# Altium PCB 2X-4.5-V3.PcbDoc (part 2 of 2)
Units mil, origin at the board's own origin, x right, y up, seen from the top; angles counter-clockwise.
Board outline 5631.85 x 1583.52 mil, 2 copper layers (TopLayer, BottomLayer); 126 components, 147 nets, 448 pads, 610 vias.
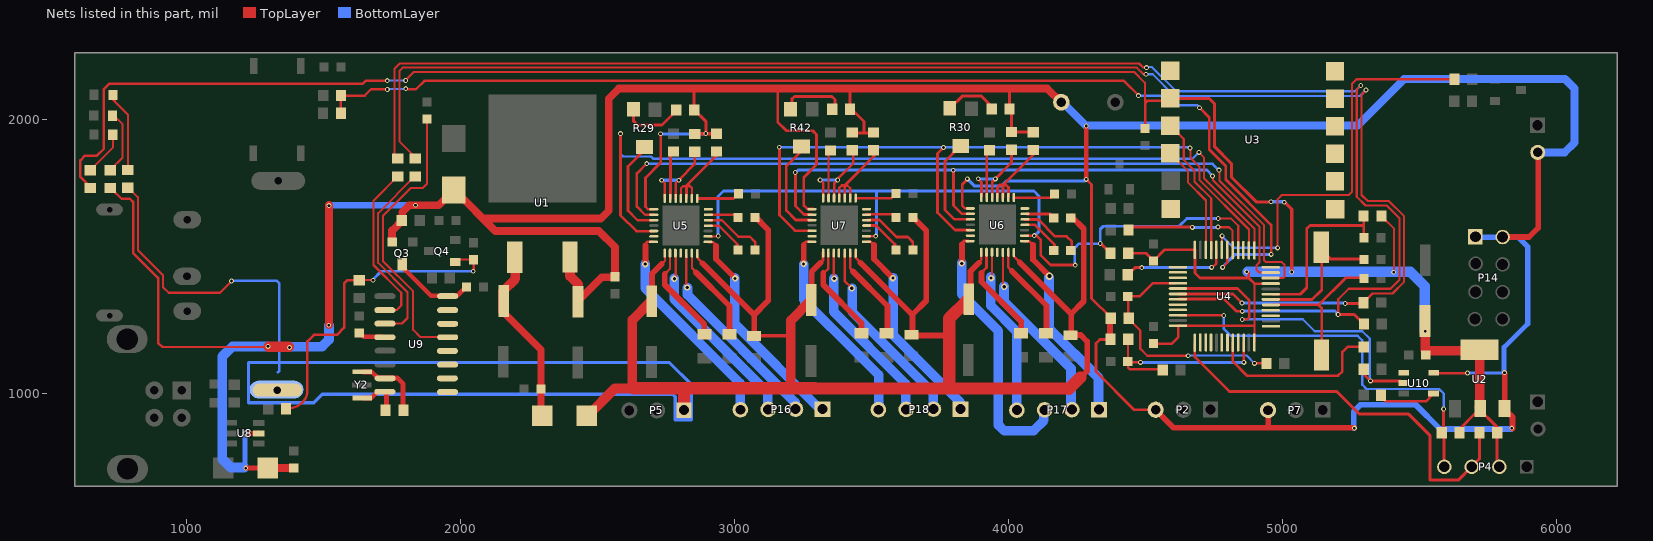
[diagram p2: the nets of this part, all layers, seen from the top]

## Via types
v1: diameter 17.72, hole 9.84, TopLayer to BottomLayer, tented both sides, 597 vias
v2: diameter 23.62, hole 11.81, TopLayer to BottomLayer, tented both sides, 11 vias
v3: diameter 27.56, hole 15.75, TopLayer to BottomLayer, tented both sides, 2 vias

## Nets (pads, with @x,y where several pads share a name; then routed paths per layer and width w, separated by ;. In a path a pad name is that pad's centre, name@x,y a point inside that pad or via, vN(x,y) a via of type N, cw(c..) or ccw(c..) an arc to the next point about the centre after c; other vN are vias at no path point) (continued)
R1-1: B1.1 C1.1 C3.2 C13.1 D4.2 D7.2 P2.3 P6.2 P7.3 P14.1 P14.2 Q3.2 R1.1 R3.2 R8.2 R12.2 R26.1 R27.1 R32.2 R33.2 R35.2 R36.2 R41.1 R43.2 R44.2 U1.3 U2.3 U5.15 U6.15 U7.15 U8.5 U10.5 | length 16229.8
  TopLayer w8.87: R1.1@727.69,1749.97 727.69,1745.81 762.06,1711.43 793.31,1711.43 804.77,1699.97 804.77,1513.93 896.02,1422.68 896.02,1185.39 911.23,1170.18 v1@1298.73,1170.18 ; U10.5@5554.35,1076.64 U10.5@5556.23,1074.77
  TopLayer w9.87: U5.15@2704.77,1672.68 2684.77,1672.68 2674.98,1682.47 2674.98,1787.68 2730.19,1842.89 v1@2730.19,1947.89 ; 3157.69,2114.56 3157.69,1991.64 3189.77,1959.56 3285.6,1959.56 3299.35,1945.81 3299.35,1836.22 3253.1,1789.97 3253.1,1686.64 3266.02,1673.72 U7.15@3287.69,1673.72 ; v1@3851.44,1785.18 3851.44,1783.93 3831.85,1764.35 3831.85,1685.6 3841.02,1676.43 U6.15@3865.81,1676.43 ; v1@4284.77,1782.06 4303.52,1763.31 4303.52,1347.68 4373.73,1277.47 R12.2@4373.73,1274.56 ; R3.2@4373.52,1197.68 4333.52,1197.68 4319.35,1183.52 4319.35,1080.81 4459.15,941.02 P2.3@4547.06,941.02 ; U10.5@5556.23,1074.77 v1@5674.77,1074.77
  TopLayer w10.87: 2852.69,2112.06 2852.27,2111.64 2852.27,2037.06 2895.19,1994.14 v1@2895.19,1950.81 ; R32.2@2863.94,1947.06 R32.2@2866.02,1949.14 ; 3422.27,2112.47 3421.02,2111.22 3421.02,2034.97 3431.02,2034.97 3472.27,1993.72 3472.27,1951.64 ; R43.2@3430.6,1948.72 3432.69,1950.81 R44.2@3517.69,1950.81 ; 4003.1,2108.72 4003.1,2044.14 4011.44,2035.81 4011.44,1961.64 4018.52,1954.56 R36.2@4092.69,1954.56 ; R3.2@4373.52,1197.68 R3.2@4376.02,1195.18
  TopLayer w11.87: R32.2@2866.02,1949.14 R35.2@2933.52,1949.14
  TopLayer w16.87: v1@4283.73,1975.6 4283.73,1783.1 v1@4284.77,1782.06
  TopLayer w17.87: v1@1217.27,727.89 1290.19,727.89 D4.2@1291.85,726.22 ; v1@1217.69,854.97 1259.77,854.97 U8.5@1260.6,855.81
  TopLayer w20.87: P2.3@4535.6,940.39 4537.69,940.39 4603.1,874.97 v1@5261.44,874.97 ; P7.3@4946.02,942.47 4948.1,940.39 4948.1,880.39 ; P14.2@5801.85,1571.22 5802.69,1572.06 5900.6,1572.06 5933.52,1604.97 P6.2@5933.52,1883.31 ; v1@5811.44,1073.72 5811.44,946.64 U2.3@5813.1,944.97 ; U2.3@5819.15,934.56 U2.3@5819.77,934.56
  TopLayer w21.87: R12.2@4370.81,1267.68 4370.81,1204.35 R3.2@4371.23,1203.93 ; U2.3@5819.77,934.56 5839.35,914.97 v1@5839.35,872.06
  TopLayer w27.87: Q3.2@1749.77,1552.89 1749.77,1595.39 1786.44,1632.06 1786.44,1662.47 1811.85,1687.89 1920.6,1687.89 1973.94,1741.22 1979.77,1741.22 2127.27,1593.72 2504.77,1593.72 2563.94,1534.56 2563.94,1437.47 2566.02,1435.39 2556.02,1425.39 2516.02,1425.39 2433.94,1343.31 C1.1@2429.77,1343.31 ; 2088.52,1639.14 2511.85,1639.14 2540.6,1667.89 2540.6,2077.06 2577.27,2113.72 4141.85,2113.72 4192.27,2063.31 B1.1@4195.6,2063.31
  TopLayer w28.87: D4.2@1303.94,730.39 1306.44,727.89 C13.1@1383.52,727.89 ; v1@1519.35,1249.97 v1@1519.35,1687.89
  TopLayer w34.87: U1.3@2399.35,1488.72 2399.35,1428.72 2429.77,1398.31 C1.1@2429.77,1343.31
  TopLayer w37.87: v1@1300.19,1170.81 v1@1373.52,1170.81
  BottomLayer w10.87: v1@3849.17,1784.58 3875,1758.75 3975.42,1758.75 3992.08,1775.42 4277.92,1775.42 v1@4283.33,1780.83 ; 4270,1775.42 v1@4283.33,1784.17 ; 4274.38,1778.33 v1@4283.12,1782.71
  BottomLayer w11.81: v1@5676.25,1075 5677.08,1075 5809.17,1075 v1@5812.08,1077.92
  BottomLayer w11.87: v1@2730.62,1948.12 2730.83,1947.92 2894.17,1947.92 v1@2895.83,1949.58
  BottomLayer w17.87: v1@1211.25,730.83 1212.92,732.5 v1@1212.92,855.83
  BottomLayer w18.81: v1@5809.58,1078.33 5809.58,1169.58 5895.42,1255.42
  BottomLayer w19.81: P14.1@5705.83,1571.25 5819.58,1571.25 5821.25,1572.08 5822.5,1573.33 5859.17,1573.33 5864.17,1568.33 5895.42,1537.08 5895.42,1255.42
  BottomLayer w20.81: v1@5260.42,873.75 5260.42,935 5284.58,959.17 5487.08,959.17 5575.42,870.83 v1@5835.42,870.83
  BottomLayer w22.87: v1@1521.25,1688.12 v1@1832.08,1688.12
  BottomLayer w28.81: B1.1@4198.33,2062.92 4282.08,1979.17 5275,1979.17 5444.58,2148.75 6031.67,2148.75 6066.25,2114.17 6066.25,1916.25 6030.83,1880.83 5932.92,1880.83 P6.2@5931.25,1879.17
  BottomLayer w34.87: v1@1373.33,1171.67 1494.17,1171.67 1519.58,1197.08 v1@1519.58,1249.17
  BottomLayer w35.87: v1@1210,730.83 1160.83,730.83 1130,761.67 1130,1135 1167.08,1172.08 v1@1297.08,1172.08
  other v1: 1215.6,727.89 1216.02,855.39 5262.69,874.14 5837.27,874.14 5675.6,1074.97 5811.02,1076.64 1375.19,1168.72 1297.27,1172.47 1518.52,1249.56 1519.35,1686.22 1835.19,1687.47 4283.94,1782.06 3849.98,1783.93 2729.77,1948.72 2895.19,1949.56 4283.94,1977.06
R1-2: D2.1 R1.2 | length 229.2
  TopLayer w7.87: R1.2@724.77,1815.81 724.77,1820.6 766.44,1862.27 766.44,1983.31 D2.1@734.98,2014.77
R2-1: C17.1 C19.1 C21.1 C22.1 C23.1 C24.1 C25.1 C30.1 C31.1 D1.1 K1.2 P5.1 pad.6 R2.1 U5.22 U5.28 U6.22 U6.28 U7.22 U7.28 | length 11227.3
  TopLayer w7.87: R2.1@785.6,1752.89 821.85,1716.64 821.85,1524.14 913.73,1432.27 913.73,1388.52 934.14,1368.1 1121.44,1368.1 1164.56,1411.22 v1@1164.98,1411.22
  TopLayer w8.87: 2728.31,1467.27 2728.52,1467.27 2746.23,1484.97 U5.22@2746.23,1511.22 ; U5.28@2864.77,1510.81 2864.77,1494.77 2891.23,1468.31 2891.23,1467.06 ; 3883.52,1471.43 3901.02,1488.93 U6.22@3901.02,1522.06 ; U6.28@4020.19,1515.39 4020.19,1500.18 4049.56,1470.81 4049.56,1468.72
  TopLayer w9.87: 3305.6,1467.47 3305.6,1468.93 3323.31,1486.64 U7.22@3323.31,1514.56 ; U7.28@3442.27,1513.52 3442.27,1497.27 3471.85,1467.68 3472.27,1467.68 ; 3883.52,1469.56 3883.52,1471.43
  TopLayer w13.87: C21.1@3072.27,1209.14 3074.77,1211.64 3199.35,1211.64
  TopLayer w19.87: C22.1@4221.85,1213.72 C22.1@4222.27,1214.14
  TopLayer w20.87: C24.1@2697.69,1346.64 2698.52,1347.47 2698.52,1437.89 2734.77,1474.14 ; 2882.69,1476.22 3071.85,1287.06 3072.27,1287.06 ; C21.1@3068.1,1210.81 3071.85,1214.56 3071.85,1287.89 3122.69,1338.72 3122.69,1598.31 C30.1@3075.6,1645.39 ; C19.1@3281.44,1349.14 3281.44,1444.97 3313.94,1477.47 ; 3459.77,1477.47 3648.1,1289.14 3648.1,1287.06 ; C17.1@3647.27,1220.81 3649.35,1222.89 3649.35,1288.31 3700.19,1339.14 3700.19,1594.97 C23.1@3647.69,1647.47 ; C17.1@3648.52,1215.39 3651.44,1212.47 3774.77,1212.47 ; C25.1@3853.52,1369.56 3861.44,1377.47 3861.44,1447.06 3892.27,1477.89 ; 4041.02,1478.72 4228.94,1290.81 4228.94,1214.97 C22.1@4229.35,1214.56 ; C22.1@4222.27,1214.14 4263.94,1214.14 4287.27,1190.81 4287.27,1082.06 4267.27,1062.06 ; 4229.35,1292.06 4230.19,1292.06 4275.19,1337.06 4275.19,1602.06 C31.1@4230.6,1646.64
  TopLayer w34.87: 3205.6,1033.72 3205.6,1267.47 C19.1@3279.77,1341.64
  TopLayer w35.87: D1.1@2466.44,922.06 2562.69,1018.31 2626.85,1018.31 2626.85,1268.72 2692.27,1334.14 C24.1@2692.27,1334.56
  TopLayer w43.87: P5.1@2815.19,944.14 2816.02,944.97 2816.02,1008.72
  TopLayer w44.87: 2631.02,1019.56 3293.52,1019.56 4221.02,1017.89 4262.27,1059.14 ; 3779.35,1024.97 3783.52,1029.14 3783.52,1274.14 C25.1@3848.1,1338.72
  BottomLayer w9.87: v1@1165,1412.5 1327.92,1412.5 1338.33,1402.08 1338.33,1194.58 1338.33,1083.33 1333.33,1078.33
  BottomLayer w11.81: 1235,966.67 1463.75,966.67 1495,997.92 2774.17,997.92 2783.33,988.75 2783.33,905 2841.25,905 2843.33,905 2843.33,1032.5 2762.08,1113.75 2706.25,1113.75 1225.83,1113.75 1225.83,966.67 1249.58,966.67
  other v1: 1163.94,1410.81
R2-2: D3.1 R2.2 | length 322.1
  TopLayer w7.87: D3.1@732.06,2096.64 732.06,2072.06 785.81,2018.31 785.81,1816.85 R2.2@786.44,1816.22 ; 737.27,2067.89 D3.1@737.27,2087.06
R9-1: C2.1 Q4.1 R9.1 R46.2 | length 1214.3
  TopLayer w7.87: R46.2@1630.39,1413.52 R46.2@1631.64,1414.77 ; R46.2@1633.52,1412.89 1635.39,1414.77 v1@1680.81,1414.77
  TopLayer w8.87: R9.1@1357.48,947.06 1370.6,947.06 ccw(c1370.6,1021.99) 1423.59,969.01 1423.73,969.14 ccw(c1382.99,1009.88) 1440.6,1009.88 1440.6,1190.81 1464.35,1214.56 1548.31,1214.56 1574.98,1241.22 1574.98,1402.47 1586.02,1413.52 R46.2@1630.39,1413.52 ; Q4.1@1983.94,1482.89 1990.81,1489.77 2047.27,1489.77 v1@2047.27,1447.27
  BottomLayer w9.87: v1@1680,1415 1680,1416.25 1710.42,1446.67 v1@2047.08,1446.67
  other v1: 1680.6,1413.72 2046.44,1446.64
R15-1: R15.1 R16.1 U4.18 | length 4175.3
  TopLayer w7.87: R16.1@1562.69,2023.72 1562.27,2024.14 1562.27,2083.93 R15.1@1566.23,2087.89
  TopLayer w8.66: v1@1799.14,2113.93 1802.06,2111.02 1837.06,2111.02 1867.69,2141.64 4421.85,2141.64 v1@4476.02,2087.47
  TopLayer w8.87: R15.1@1566.23,2087.89 1650.19,2087.89 1673.31,2111.02 v1@1732.27,2111.02 ; v1@4781.65,1461.02 4782.27,1461.02 4798.94,1477.68 U4.18@4798.94,1524.77
  TopLayer w9.87: v1@4697.48,2043.93 4733.1,2008.31 4733.1,1891.64 4793.31,1831.43 4793.31,1781.85 4959.15,1616.02 4959.15,1508.1 v1@4958.73,1507.68
  BottomLayer w7.87: v1@1734.58,2109.38 1737.29,2112.08 v1@1799.38,2112.08
  BottomLayer w8.87: v1@4474.79,2086.88 4475,2087.08 4556.46,2087.08 4590.42,2053.12 4689.17,2053.12 v1@4698.12,2044.17
  BottomLayer w10.87: v1@4783.12,1460 4783.12,1464.38 4827.5,1508.75 v1@4957.71,1508.75
  other v1: 4781.85,1460.81 4958.94,1508.31 4697.27,2043.72 4474.77,2087.89 1732.69,2110.39 1799.77,2113.31
R29-2: R26.2 R29.2 | length 234.4
  TopLayer w10.87: R29.2@2628.52,2045.81 2631.85,2042.47 2631.85,1994.14 2645.19,1980.81 2735.19,1980.81 R26.2@2786.44,2032.06
R30-2: R27.2 R30.2 | length 193
  TopLayer w10.87: R30.2@3791.44,2046.22 3831.02,2085.81 3901.44,2085.81 3938.52,2048.72 R27.2@3938.52,2034.56
R31-1: C8.1 C9.1 C14.1 C15.1 C16.2 P4.2 R6.1 R10.1 R14.1 R31.1 R34.1 U2.2 U2.4 U3.2 U4.9 U4.24 U4.36 U4.48 | length 8830.3
  TopLayer w7.87: v1@1799.77,2143.1 1799.77,2144.77 1829.14,2174.14 4458.73,2174.14 4498.1,2134.77 C16.2@4498.1,1970.18 ; 4499.98,2070.39 4507.48,2070.39 ; 4500.81,2067.06 4505.81,2067.06 ; R6.1@5361.85,1643.1 5366.44,1643.1 5407.9,1601.64 v1@5407.9,1443.72
  TopLayer w8.87: R31.1@651.44,1751.85 611.85,1791.43 611.85,1851.43 629.14,1868.72 672.27,1868.72 697.69,1894.14 697.69,1951.43 697.69,2111.64 716.85,2130.81 1409.77,2130.81 1642.48,2130.81 1654.56,2142.89 1733.73,2142.89 v1@1733.94,2143.1 ; U4.48@4898.31,1191.64 4898.31,1401.02
  TopLayer w9.87: R34.1@4436.65,1512.47 4502.9,1512.47 4529.35,1486.02 C14.1@4529.35,1479.97 ; C16.2@4498.52,1966.43 4499.15,1967.06 4499.15,2059.35 4509.35,2069.56 U3.2@4572.48,2069.56 ; C15.1@4524.77,1181.85 4525.4,1182.47 4596.65,1182.47 4619.56,1205.39 4619.56,1247.68 4897.06,1247.68 ; C14.1@4531.44,1484.35 4531.44,1486.22 4570.6,1525.39 4680.81,1525.39 4680.81,1440.6 4699.56,1421.85 4877.27,1421.85 4897.69,1401.43 U4.9@4958.1,1401.43 ; v1@4870.19,1446.64 4871.65,1446.64 4877.69,1440.6 4877.69,1422.06 ; 4897.9,1401.43 4898.31,1401.02
  TopLayer w10.87: U3.2@4572.48,2069.56 4580.4,2077.47 4733.1,2077.47 4752.9,2057.68 4752.9,1900.81 4813.52,1840.18 4813.52,1790.81 4904.15,1700.18 v1@4958.52,1700.18 ; R10.1@5644.15,867.68 5712.69,936.22 5712.69,948.93 5783.94,877.68 5783.94,859.77 5783.94,742.27 P4.2@5793.1,733.1
  TopLayer w11.87: v1@5008.73,1698.93 5034.35,1673.31 5034.35,1445.81 v1@5035.19,1444.97
  TopLayer w34.87: C8.1@5521.02,1243.31 5521.02,1156.22 5714.77,1156.22 5720.6,1150.39 5720.6,952.06 U2.2@5718.52,949.97
  BottomLayer w7.87: v1@1732.08,2143.54 1732.5,2143.12 v1@1798.96,2143.12
  BottomLayer w11.87: v1@4958.33,1699.79 4958.75,1700.21 v1@5006.46,1700.21
  BottomLayer w37.81: v1@4872.5,1444.58 5467.5,1444.58 5519.58,1392.5 v1@5519.58,1228.75
  other v1: 5521.85,1227.47 5406.02,1443.31 5034.35,1444.14 4869.35,1444.97 5006.85,1698.72 4958.1,1700.39 1732.06,2142.68 1799.35,2143.31
R31-2: D5.1 R31.2 | length 156.1
  TopLayer w7.87: R31.2@651.85,1819.35 652.06,1819.35 730.6,1897.89 D5.1@730.6,1942.68
R42-2: R41.2 R42.2 | length 246
  TopLayer w10.87: R42.2@3209.35,2037.47 3209.35,2074.97 3219.35,2084.97 3355.19,2084.97 3366.85,2073.31 3366.85,2038.31 R41.2@3361.85,2033.31
R51-2: R19.2 R51.2 U4.31 | length 5763.2
  TopLayer w7.87: R51.2@1769.14,1856.85 1759.35,1866.64 1759.35,2186.64 1778.1,2205.39 4476.65,2205.39 4491.65,2190.39 v1@4504.98,2190.39 ; v1@5204.15,1290.81 5204.15,1344.35 5242.48,1382.68 5394.77,1382.68 5427.27,1415.18 5427.27,1639.77 5380.4,1686.64 5303.31,1686.64 5271.23,1718.72 5271.23,2110.81 5285.6,2125.18 v1@5286.44,2125.18
  TopLayer w9.87: U4.31@4623.1,1345.18 4787.48,1345.18 4831.85,1300.81 4854.15,1300.81 v1@4854.56,1300.39
  TopLayer w10.87: v1@5204.15,1290.81 5205.81,1289.14 5262.27,1289.14 R19.2@5295.6,1255.81
  BottomLayer w7.87: v1@4504.58,2190.62 4506.46,2192.5 4523.33,2192.5 4612.08,2103.75 5265.21,2103.75 v1@5285,2123.54
  BottomLayer w10.87: v1@4852.92,1301.25 5191.67,1301.25 5202.92,1290 v1@5202.92,1289.58
  other v1: 5203.52,1289.14 4853.31,1300.39 5286.02,2124.56 4503.94,2189.97
R52-2: R18.2 R52.2 U4.30 | length 5614.1
  TopLayer w7.87: R52.2@1832.48,1856.43 1832.48,1864.97 1777.48,1919.97 1777.48,2178.93 1788.52,2189.97 4468.73,2189.97 4493.73,2164.97 v1@4504.15,2164.97 ; R18.2@5299.56,1335.81 5329.15,1365.39 5401.65,1365.39 5444.35,1408.1 5444.35,1647.27 5388.52,1703.1 5311.23,1703.1 5288.94,1725.39 5288.94,2067.06 5288.94,2091.22 5306.23,2108.52 v1@5306.23,2108.72
  TopLayer w9.87: U4.30@4622.9,1363.72 4819.56,1363.72 v1@4852.06,1331.22
  TopLayer w10.87: v1(5229.35,1329.14) R18.2@5298.1,1329.14
  BottomLayer w7.87: v1@4501.67,2165.62 4526.67,2165.62 4605.62,2086.67 5283.12,2086.67 v1@5305.42,2108.96
  BottomLayer w10.87: v1@4852.08,1331.25 4853.33,1330 v1@5229.58,1330
  other v1: 4852.48,1331.02 5305.19,2108.72 4502.27,2165.81
U1-1: C4.1 C6.1 D1.2 U1.1 | length 622
  TopLayer w26.87: C6.1@2154.77,1298.72 2293.52,1159.97 2293.52,927.06 D1.2@2297.27,923.31
  TopLayer w34.87: C6.1@2154.77,1298.72 2154.77,1373.72 2199.77,1418.72 2199.77,1464.14 U1.1@2202.27,1466.64
U3-1: U3.1
U3-6: U3.6
U3-7: U3.7
U3-8: U3.8
U3-9: U3.9
U3-10: U3.10
U3-11: U3.11
U3-12: U3.12
U4-1: U4.1
U4-3: U4.3
U4-4: U4.4
U4-5: C12.2 U4.5 Y1.2 | length 547.5
  TopLayer w9.87: U4.5@4963.94,1324.14 5132.48,1324.14 5231.23,1422.89 C12.2@5299.56,1422.89 ; 5130.4,1323.52 5132.69,1323.52 5143.52,1312.68 Y1.2@5143.52,1159.35
U4-6: C11.2 U4.6 Y1.1 | length 505.9
  TopLayer w9.87: U4.6@4958.1,1343.52 5108.31,1343.52 5143.73,1378.93 5143.73,1517.06 Y1.1@5150.4,1517.06
  TopLayer w10.87: Y1.1@5150.4,1517.06 5176.44,1491.02 C11.2@5300.4,1491.02
U4-7: C10.2 R6.2 U4.7 | length 642.8
  TopLayer w9.87: U4.7@4964.15,1362.68 5065.19,1362.68 5088.94,1386.43 5088.94,1602.06 5100.6,1613.72 5295.19,1613.72 ; C10.2@5296.85,1565.81 5297.27,1566.22 R6.2@5297.27,1647.06
U4-12: U4.12
U4-15: U4.15
U4-17: R24.1 U4.17 | length 454.9
  TopLayer w7.87: v1@4764.15,1608.1 4764.77,1607.47 4805.4,1607.47 4818.31,1594.56 U4.17@4818.31,1534.35
  TopLayer w9.87: R24.1@4432.48,1601.64 4438.94,1608.1 v1@4670.19,1608.1
  BottomLayer w10.87: v1@4670.62,1607.08 v1@4765.21,1607.08
  other v1: 4671.44,1607.06 4765.19,1608.31
U4-19: R17.2 U4.19 | length 1502.7
  TopLayer w7.87: U4.19@4779.15,1540.39 4779.15,1576.64 v1@4780.6,1578.1 ; v1@4982.69,1530.81 4982.69,1709.77 4997.9,1724.97 5242.27,1724.97 5254.15,1736.85 5254.15,2131.02 5270.81,2147.68 5631.02,2147.68 R17.2@5632.27,2146.43
  BottomLayer w8.87: v1@4778.54,1575.21 4821.46,1532.29 4983.54,1532.29 v1@4983.75,1532.5
  other v1: 4982.69,1532.06 4780.19,1575.81
U4-20: R5.1 U4.20 | length 394.6
  TopLayer w8.87: R5.1@4434.15,1434.35 R5.1@4436.44,1434.35 ; v1@4741.44,1460.18 4743.73,1460.18 4758.94,1475.39 U4.20@4758.94,1524.56
  TopLayer w9.87: R5.1@4436.44,1434.35 4462.9,1460.81 v1@4485.4,1460.81
  BottomLayer w10.87: v1@4485.83,1461.25 4487.5,1459.58 4740.42,1459.58 v1@4743.33,1462.5
  other v1: 4486.44,1459.97 4741.85,1460.81
U4-21: U3.3 U4.21 | length 493.2
  TopLayer w7.87: U3.3@4607.9,1961.85 4639.98,1929.77 4639.98,1853.31 4679.35,1813.93 4679.35,1773.72 4740.4,1712.68 U4.21@4740.4,1523.52
U4-22: U3.4 U4.22 | length 390.7
  TopLayer w7.87: U3.4@4600.19,1869.77 4600.19,1867.89 4655.81,1812.27 4655.81,1770.39 4721.02,1705.18 U4.22@4721.02,1529.14
U4-25: U4.25
U4-26: U4.26
U4-27: U4.27
U4-28: C18.1 R12.1 R49.2 U4.28 | length 890
  TopLayer w8.87: U4.28@4608.31,1403.52 4527.48,1403.52 4478.73,1354.77 4441.85,1354.77 4437.27,1350.18 4437.27,1273.93 4481.65,1229.56 4481.65,1163.72 4506.85,1138.52 v1@4658.73,1138.52 ; v1@4896.23,1110.81 4942.48,1110.81 R49.2@4943.31,1109.97
  BottomLayer w7.87: v1@4655.21,1139.17 4870,1139.17 4899.58,1109.58 v1@4899.58,1109.17
  other v1: 4898.52,1110.39 4656.02,1138.31
U4-29: R13.2 U4.29 U10.2 | length 1182.9
  TopLayer w9.87: U4.29@4622.06,1383.72 4835.81,1383.72 4879.15,1340.39 4879.15,1278.31 4872.69,1271.85 4854.98,1271.85 v1@4854.35,1271.22 ; R13.2@5298.31,1083.31 5298.31,1069.97 5322.27,1046.02 5430.19,1046.02 U10.2@5438.31,1037.89
  BottomLayer w8.87: v1@4852.29,1271.67 5074.17,1271.67 5117.92,1227.92 5291.67,1227.92 5318.75,1200.83 5318.75,1048.75 v1@5321.25,1046.25
  other v1: 5321.44,1046.64 4853.73,1270.6
U4-32: U4.32
U4-33: U4.33
U4-34: P4.4 R10.2 U4.34 | length 1469.8
  TopLayer w9.87: U4.34@4626.23,1285.6 4782.06,1285.6 v1@4786.65,1285.6 ; v1@5588.52,944.56 5588.31,944.35 5588.31,856.22 5590.19,854.35 P4.4@5590.19,738.93
  BottomLayer w8.87: v1@4785.42,1286.67 4785.42,1237.92 4812.71,1210.62 5275.21,1210.62 5291.46,1194.38 5291.46,1033.12 5307.71,1016.88 5571.88,1016.88 5589.38,999.38 5589.38,943.33 v1@5588.75,942.71
  other v1: 5588.52,944.14 4786.02,1284.97
U4-37: P4.3 R14.2 U4.37 | length 1490.5
  TopLayer w9.87: U4.37@4680.4,1180.81 4680.4,1133.52 4806.23,1007.68 5198.52,1007.68 ; P4.3@5692.27,734.56 P4.3@5692.27,734.97 ; P4.3@5698.31,740.81 5698.31,741.02 5719.56,762.27 5719.56,857.06 R14.2@5717.48,859.14
  TopLayer w10.87: 5198.52,1007.68 5281.23,924.97 5461.02,924.97 5538.1,847.89 5538.1,684.14 5641.85,684.14 P4.3@5692.27,734.56
U4-38: U4.38
U4-39: U4.39
U4-40: U4.40
U4-42: U4.42
U4-43: U4.43
U4-44: R4.2 U4.44 | length 653.2
  TopLayer w9.87: U4.44@4818.94,1185.6 4818.94,1116.85 4869.98,1065.81 4953.73,1065.81 5203.52,1065.81 5218.94,1081.22 5218.94,1151.64 5238.94,1171.64 5295.4,1171.64 R4.2@5296.65,1170.39
U4-45: U4.45
U4-46: C7.1 R3.1 R48.2 U4.46 | length 742.8
  TopLayer w8.87: C7.1@4437.9,1120.6 4436.44,1119.14 4436.44,1095.6 4443.52,1088.52 R48.2@4568.31,1088.52 ; R3.1@4438.52,1205.39 4436.44,1203.31 4436.44,1119.56 4440.81,1115.18 v1@4481.02,1115.18
  TopLayer w9.87: v1@4858.31,1113.31 4858.73,1113.72 U4.46@4858.73,1185.39
  BottomLayer w9.87: v1@4483.12,1113.75 4859.58,1113.75 v1@4860,1114.17
  other v1: 4481.85,1114.14 4859.35,1114.14
U5-1: P16.1 U5.1 | length 798.3
  TopLayer w8.87: U5.1@2906.44,1553.31 2921.02,1553.31 2932.27,1542.06
  TopLayer w20.87: 2932.69,1539.97 2932.69,1491.22 3001.44,1422.47 v2@3001.44,1421.22
  BottomLayer w34.81: v2@3000,1422.08 3000,1255.42 3314.17,941.25 P16.1@3323.75,941.25
  other v2: 3001.85,1420.39
U5-2: R34.2 U4.16 U5.2 U6.2 U7.2 | length 2857.7
  TopLayer w7.87: U5.2@2904.77,1573.93 v1@2942.06,1573.93 ; v1@4764.98,1638.72 4812.9,1638.72 4838.73,1612.89 U4.16@4838.73,1536.43
  TopLayer w8.87: U6.2@4058.73,1576.64 4093.73,1576.64 4102.48,1576.64 4118.52,1560.6 4118.52,1504.35
  TopLayer w9.87: U7.2@3481.85,1574.77 3514.98,1574.77 v1@3515.81,1575.6 ; 4118.52,1504.35 4153.31,1469.56 v1@4243.73,1469.56 ; v1@4335.19,1549.35 4371.02,1513.52 R34.2@4371.02,1509.35
  BottomLayer w9.87: v1@2940,1575.21 v1@2940.21,1575 ; v1@4242.5,1469.58 4242.5,1532.5 4257.5,1547.5 4334.17,1547.5 4335,1548.33 4335,1600 4346.04,1611.04 4623.12,1611.04 4651.25,1639.17 v1@4766.88,1639.17
  BottomLayer w10.87: v1@2940,1575.21 2940,1719.79 2959.79,1739.58 3715.42,1739.58 4092.92,1739.58 4110.83,1721.67 4110.83,1591.25 v1@4094.17,1574.58 ; v1@3515,1576.25 3518.33,1579.58 3518.33,1642.92 3518.33,1735.83
  other v1: 4243.94,1469.14 4335.19,1547.89 2940.6,1575.39 3515.6,1574.97 4094.35,1576.64 4765.6,1639.14
U5-4: C27.2 U5.4 | length 194.7
  TopLayer w8.87: U5.4@2909.14,1612.89 2942.69,1612.89 3012.27,1543.31 C27.2@3012.27,1523.52 ; C27.2@3008.31,1523.52 3008.31,1547.06 ; C27.2@3008.73,1524.77 3008.73,1544.14
U5-5: C27.1 U5.5 | length 227.9
  TopLayer w8.87: U5.5@2905.19,1632.68 2954.14,1632.68 3014.35,1572.47 3056.44,1572.47 3075.19,1553.72 C27.1@3075.19,1528.52
U5-6: C30.2 U5.6 | length 101
  TopLayer w8.87: U5.6@2906.64,1653.1 C30.2@3007.69,1653.1
U5-7: U5.7
U5-8: C33.2 U5.8 | length 153.5
  TopLayer w9.87: U5.8@2866.44,1712.47 2996.64,1712.47 C33.2@3013.1,1728.93
U5-9: R35.1 U5.9 U5.10 U5.11 | length 346.4
  TopLayer w7.87: 2834.14,1759.77 2834.14,1767.89
  TopLayer w8.87: U5.11@2804.56,1716.43 2804.56,1749.77 2812.06,1757.27 2837.89,1757.27 2844.77,1750.39 U5.9@2844.77,1712.89
  TopLayer w9.87: 2823.52,1757.47 2934.77,1868.72 R35.1@2934.77,1886.02 ; U5.10@2824.56,1714.56 2824.56,1756.64 ; 2831.85,1758.31 2831.85,1762.89
U5-12: R32.1 U5.12 U5.14 | length 328.8
  TopLayer w8.87: v1@2733.94,1779.77 2733.94,1779.56 2745.39,1768.1 U5.14@2745.39,1717.06 ; U5.12@2785.6,1711.85 2785.6,1768.31 2796.85,1779.56 2796.85,1780.39 2854.56,1838.1 R32.1@2854.56,1881.43
  BottomLayer w11.87: v1@2733.54,1778.33 2733.75,1778.54 2768.12,1778.54 v1@2796.67,1778.54
  other v1: 2733.94,1779.14 2796.85,1779.14
U5-13: R38.1 U5.13 | length 157.9
  TopLayer w9.87: U5.13@2766.02,1713.52 R38.1@2766.02,1871.43
U5-16: U4.10 U5.16 | length 2921.6
  TopLayer w7.87: v1@4769.98,1816.64 4769.98,1777.89 4933.31,1614.56 4933.31,1487.06 4940.4,1479.97 4997.9,1479.97 5007.48,1470.39 5007.48,1427.06 5002.48,1422.06 U4.10@4956.65,1422.06
  TopLayer w8.87: v1@2680.81,1839.97 2679.77,1839.97 2643.52,1803.72 2643.52,1682.47 2673.1,1652.89 U5.16@2707.69,1652.89
  BottomLayer w9.87: v1@2679.79,1838.75 2680,1838.96 4745.21,1838.96 v1@4767.5,1816.67
  other v1: 4768.94,1815.81 2679.77,1839.56
U5-17: R29.3 U5.17 | length 364.2
  TopLayer w8.87: 2610.81,1668.1 2646.23,1632.68 U5.17@2704.14,1632.68
  TopLayer w9.87: 2610.81,1668.1 2610.81,1829.77 R29.3@2677.69,1896.64
U5-19: U4.13 U5.19 | length 3086.4
  TopLayer w7.87: v1@4694.98,1881.02 4713.52,1862.47 4713.52,1787.06 4897.69,1602.89 U4.13@4897.69,1531.43
  TopLayer w9.87: v1@2583.73,1949.97 2583.73,1651.02 2641.44,1593.31 U5.19@2705.81,1593.31
  BottomLayer w8.87: v1@2582.71,1951.04 2585.21,1948.54 2585.21,1873.96 2593.54,1865.62 2695.42,1865.62 2704.17,1856.88 4671.04,1856.88 v1@4697.08,1882.92
  other v1: 4695.6,1880.81 2583.52,1949.14
U5-20: U5.20
U5-21: P16.4 U5.21 | length 777.9
  TopLayer w8.87: 2671.02,1543.72 2681.02,1553.72 U5.21@2700.81,1553.72
  TopLayer w21.87: v2@2674.14,1473.93 2674.77,1474.56 2674.77,1541.64
  BottomLayer w34.81: v2@2673.33,1474.17 2673.33,1385 3020.83,1037.5 3020.83,987.08 3020.83,943.33 P16.4@3020,942.5
  other v2: 2673.94,1472.89
U5-23: R21.1 U5.23 | length 372.7
  TopLayer w8.87: 2745.6,1432.06 2745.6,1436.85 2764.56,1455.81 U5.23@2764.56,1513.93
  TopLayer w20.87: 2745.6,1437.06 2745.6,1397.47 2889.35,1253.72 2889.35,1215.39 R21.1@2890.6,1214.14
U5-24: P16.3 U5.24 | length 720.6
  TopLayer w8.87: v2@2779.98,1415.6 2785.19,1420.81 U5.24@2785.19,1512.47
  BottomLayer w34.81: v2@2780.42,1420.42 2780.42,1344.17 3120.83,1003.75 3120.83,944.58 P16.3@3117.5,941.25
  other v2: 2780.6,1419.14
U5-25: U5.25
U5-26: P16.2 U5.26 | length 727.1
  TopLayer w8.87: v2@2824.56,1389.35 U5.26@2824.56,1505.39
  BottomLayer w34.81: v2@2828.33,1386.25 2828.33,1360.83 3221.25,967.92 3221.25,939.17 P16.2@3220.42,938.33
  other v2: 2827.69,1387.47
U5-27: R20.1 U5.27 | length 355.2
  TopLayer w8.87: U5.27@2844.77,1510.6 2844.77,1458.52 2865.81,1437.47 2865.81,1435.18
  TopLayer w20.87: 2858.52,1443.31 2981.85,1319.97 R20.1@2981.85,1223.31
U6-1: P17.1 U6.1 | length 725.1
  TopLayer w9.87: U6.1@4059.35,1556.64 4075.6,1556.64 4088.1,1544.14
  TopLayer w20.87: 4089.35,1543.31 4089.35,1489.14 4148.1,1430.39 v3@4148.1,1429.14
  BottomLayer w36.81: v3@4148.33,1424.58 4148.33,1316.25 4148.33,1237.92 4329.17,1057.08 4329.17,949.17 P17.1@4327.5,947.5
  other v3: 4149.58,1429.17
U6-4: C28.2 U6.4 | length 157.1
  TopLayer w9.87: U6.4@4063.31,1616.02 4096.85,1616.02 4168.31,1544.56 C28.2@4168.31,1522.06
U6-5: C28.1 U6.5 | length 240.6
  TopLayer w9.87: U6.5@4058.31,1635.81 4108.94,1635.81 4170.4,1574.35 4211.85,1574.35 4231.44,1554.77 4231.44,1529.14 C28.1@4225.6,1523.31
U6-6: C31.2 U6.6 | length 109.4
  TopLayer w9.87: U6.6@4065.6,1655.81 4153.52,1655.81 C31.2@4168.73,1640.6
U6-7: U6.7
U6-8: C34.2 U6.8 | length 150.6
  TopLayer w9.87: U6.8@4020.6,1714.97 4154.15,1714.97 C34.2@4166.23,1727.06
U6-9: R36.1 U6.9 U6.10 U6.11 | length 336.6
  TopLayer w9.87: U6.11@3959.98,1716.43 3959.98,1754.14 3967.69,1761.85 3991.02,1761.85 3999.98,1752.89 U6.9@3999.98,1718.72 ; U6.10@3980.19,1715.81 3980.19,1762.27 4091.64,1873.72 R36.1@4091.64,1887.47
U6-12: R33.1 U6.12 U6.14 | length 332.6
  TopLayer w9.87: v1@3889.14,1784.56 3889.14,1783.31 3901.23,1771.22 U6.14@3901.23,1719.77 ; U6.12@3940.81,1717.47 3940.81,1772.89 4011.02,1843.1 4011.02,1887.89 R33.1@4012.06,1888.93
  BottomLayer w10.87: v1@3890.62,1784.58 3891.04,1784.17 v1@3952.29,1784.17
  other v1: 3889.98,1784.35 3952.27,1784.14
U6-13: R39.1 U6.13 | length 162.1
  TopLayer w9.87: U6.13@3921.23,1716.85 R39.1@3921.23,1878.93
U6-17: R30.3 U6.17 | length 354.8
  TopLayer w9.87: R30.3@3819.77,1899.35 3768.31,1847.89 3768.31,1670.39 3802.48,1636.22 U6.17@3858.73,1636.22
U6-20: U6.20
U6-21: P17.3 U6.21 | length 983.7
  TopLayer w9.87: 3825.19,1544.97 3837.27,1557.06 U6.21@3852.89,1557.06
  TopLayer w20.87: v2@3830.19,1474.14 3830.19,1545.81
  BottomLayer w34.81: v2@3830,1477.5 3830,1362.08 3963.33,1228.75 3963.33,885.42 3984.17,864.58 4020.42,864.58 4091.67,864.58 4129.58,902.5 4129.58,943.33 P17.3@4130,943.75
  other v2: 3829.56,1475.39
U6-23: R23.1 U6.23 | length 371.9
  TopLayer w9.87: 3902.48,1433.52 3902.48,1442.27 3920.19,1459.97 U6.23@3920.19,1518.52
  TopLayer w20.87: 3901.44,1441.22 3901.44,1408.72 4046.44,1263.72 4046.44,1222.89 R23.1@4045.6,1222.06
U6-24: P17.4 U6.24 | length 619.7
  TopLayer w8.87: v2@3936.85,1420.81 3939.98,1423.93 U6.24@3939.98,1513.31
  BottomLayer w34.81: v2@3935.42,1426.25 3935.42,1321.67 4030,1227.08
  BottomLayer w35.81: P17.4@4028.75,940 4028.75,946.67 4030,947.92 4030,1227.08
  other v2: 3936.64,1421.85
U6-25: U6.25
U6-26: P17.2 U6.26 | length 674.3
  TopLayer w8.87: U6.26@3979.98,1513.31 3979.98,1394.56 v2@3983.52,1391.02
  BottomLayer w35.81: v2@3984.17,1391.67 3984.17,1336.25 4228.75,1091.67 4228.75,945.42 P17.2@4230.83,943.33
  other v2: 3984.56,1390.18
U6-27: R22.1 U6.27 | length 357
  TopLayer w8.87: U6.27@3999.77,1518.31 3999.77,1461.02 4016.85,1443.93 4016.85,1443.72
  TopLayer w20.87: 4012.27,1447.47 4138.52,1321.22 4138.52,1224.97 R22.1@4138.1,1224.56
U7-1: P18.1 U7.1 | length 767.7
  TopLayer w9.87: U7.1@3484.77,1554.56 3496.23,1554.56 3509.77,1541.02 3509.77,1536.02
  TopLayer w20.87: 3509.35,1543.31 3509.35,1491.22 3577.27,1423.31 v2@3577.27,1422.06
  BottomLayer w34.81: v2@3578.75,1422.08 3578.75,1214.17 3823.75,969.17 3823.75,950.42 P18.1@3823.75,940.83
  other v2: 3578.1,1421.85
U7-4: C20.2 U7.4 | length 172.2
  TopLayer w9.87: U7.4@3484.98,1613.93 3517.06,1613.93 3586.23,1544.77 C20.2@3586.23,1523.52 ; 3583.94,1545.18 3583.94,1529.14 C20.2@3587.48,1525.6
U7-5: C20.1 U7.5 | length 224.1
  TopLayer w9.87: U7.5@3485.39,1633.72 3528.94,1633.72 3591.02,1571.64 3632.89,1571.64 3650.19,1554.35 C20.1@3650.19,1527.89
U7-6: C23.2 U7.6 | length 115.7
  TopLayer w8.87: U7.6@3479.98,1654.14 3579.77,1654.14 C23.2@3591.02,1642.89
U7-7: U7.7
U7-8: C26.2 U7.8 | length 155.2
  TopLayer w9.87: U7.8@3442.69,1713.72 3572.27,1713.72 C26.2@3590.39,1731.85
U7-9: R44.1 U7.9 U7.10 U7.11 | length 363.8
  TopLayer w5.87: 3391.02,1757.68 3411.44,1757.68
  TopLayer w8.87: U7.11@3382.69,1717.27 3382.69,1752.06 3391.23,1760.6 3411.44,1760.6 3422.48,1749.56 U7.9@3422.48,1713.52 ; U7.10@3402.06,1713.31 3402.06,1759.77 ; 3404.14,1761.02 3404.14,1762.27
  TopLayer w9.87: 3404.14,1762.27 3508.94,1867.06 R44.1@3508.94,1881.22 ; 3507.06,1866.64 R44.1@3507.06,1881.22
U7-12: R43.1 U7.12 U7.14 | length 337.2
  TopLayer w8.87: v1@3312.06,1781.43 3312.06,1780.6 3323.73,1768.93 U7.14@3323.73,1716.22 ; U7.12@3363.31,1714.14 3363.31,1767.68 3377.89,1782.27 3377.89,1785.18 3433.94,1841.22 R43.1@3433.94,1888.31
  BottomLayer w11.87: v1@3312.92,1780 v1@3376.67,1780
  other v1: 3312.69,1779.97 3376.44,1779.97
U7-13: R45.1 U7.13 | length 177.9
  TopLayer w8.87: U7.13@3343.1,1713.93 3343.1,1888.31 R45.1@3345.6,1890.81
U7-16: U4.11 U6.16 U7.16 | length 2396.1
  TopLayer w7.87: v1@4745.19,1795.81 4745.19,1793.31 4746.23,1792.27 4746.23,1779.77 4916.44,1609.56 4916.44,1479.97 4905.6,1469.14 4905.6,1452.68 4916.65,1441.64 U4.11@4946.65,1441.64
  TopLayer w9.87: v1@3221.44,1808.31 3222.27,1807.47 3222.27,1684.97 3253.52,1653.72 U7.16@3283.1,1653.72 ; v1@3799.56,1814.97 3799.56,1687.47 3830.81,1656.22 U6.16@3857.27,1656.22
  BottomLayer w9.87: v1@3221.88,1806.25 3222.92,1806.25 3232.71,1816.04 3798.96,1816.04 4212.29,1816.04 4724.38,1816.04 v1@4745.42,1795
  other v1: 4745.19,1794.56 3221.44,1807.06 3798.52,1815.39
U7-17: R42.3 U7.17 | length 365.1
  TopLayer w9.87: R42.3@3241.02,1904.56 3241.02,1882.47 3189.35,1830.81 3189.35,1667.89 3223.52,1633.72 U7.17@3282.27,1633.72
U7-19: U4.14 U6.19 U7.19 | length 2740.2
  TopLayer w7.87: v1@4662.06,1898.72 4664.35,1896.43 4664.35,1861.02 4696.85,1828.52 4696.85,1780.18 4878.1,1598.93 U4.14@4878.1,1533.72
  TopLayer w9.87: v1@3163.94,1901.64 3163.94,1651.64 3220.6,1594.97 U7.19@3279.35,1594.97 ; v1@3762.89,1899.97 3762.89,1897.89 3741.23,1876.22 3741.23,1660.6 3804.77,1597.06 U6.19@3861.64,1597.06
  BottomLayer w8.87: v1@3161.46,1899.58 3162.29,1898.75 3763.75,1898.75 3764.17,1899.17 v1@4662.71,1899.17
  other v1: 4662.69,1896.64 3762.69,1898.72 3163.1,1899.56
U7-20: U7.20
U7-21: P18.4 U7.21 | length 745.5
  TopLayer w9.87: 3250.39,1543.31 3261.85,1554.77 U7.21@3278.31,1554.77
  TopLayer w20.87: v2@3252.69,1474.56 3252.69,1542.89
  BottomLayer w34.81: v2@3252.5,1471.67 3252.5,1342.5 3455.42,1139.58 3526.25,1068.75 3526.25,945 3524.58,943.33 P18.4@3524.58,941.25
  other v2: 3252.06,1473.31
U7-23: R40.1 U7.23 | length 370.6
  TopLayer w9.87: 3323.73,1431.22 3323.73,1438.1 3342.48,1456.85 U7.23@3342.48,1513.72
  TopLayer w20.87: 3323.94,1440.39 3323.94,1397.47 3463.94,1257.47 3463.94,1223.31 R40.1@3460.19,1219.56
U7-24: P18.3 U7.24 | length 680.9
  TopLayer w8.87: U7.24@3362.69,1513.72 3362.69,1422.47 v2@3364.77,1420.39
  BottomLayer w34.81: v2@3362.5,1420.42 3362.5,1298.33 3625,1035.83 3625,945.42 P18.3@3622.92,943.33
  other v2: 3363.73,1419.97
U7-25: U7.25
U7-26: P18.2 U7.26 | length 703.2
  TopLayer w9.87: U7.26@3402.06,1512.27 3402.06,1411.22 3428.1,1385.18 v2(3428.1,1384.35)
  BottomLayer w34.81: v2@3429.58,1384.17 3429.58,1298.33 3725.42,1002.5 3725.42,947.5 P18.2@3721.67,943.75
U7-27: R37.1 U7.27 | length 365
  TopLayer w9.87: U7.27@3422.27,1515.18 3422.27,1458.72 3439.98,1441.02 3439.98,1438.72
  TopLayer w20.87: 3431.85,1447.06 3558.52,1320.39 R37.1@3558.52,1218.31
U9-2: R51.1 U9.2 | length 613.5
  TopLayer w7.87: U9.2@1733.31,1305.81 1767.69,1305.81 1783.31,1321.43 1783.31,1368.72 1682.27,1469.77 1682.27,1704.35 R51.1@1774.77,1796.85
  TopLayer w8.87: R51.1@1774.77,1796.85 R51.1@1774.77,1798.31
U9-3: R52.1 U9.3 | length 709.1
  TopLayer w7.87: U9.3@1725.81,1258.31 1727.89,1256.22 1786.23,1256.22 1806.23,1276.22 1806.23,1370.39 1698.94,1477.68 1698.94,1658.93 R52.1@1834.98,1794.97
U9-4: C44.1 U9.4 | length 89.5
  TopLayer w16.87: C44.1@1631.02,1223.72 1646.85,1207.89 U9.4@1713.94,1207.89
U9-9: U9.9
U9-10: U9.10
U9-11: U9.11
U9-12: U9.12
U9-13: C43.1 U9.13 | length 1045.8
  TopLayer w7.87: C43.1@1878.52,2007.06 1877.27,2005.81 1877.27,1766.02 1862.06,1750.81 1818.31,1750.81 1716.23,1648.72 1716.23,1484.14 1826.64,1373.72 1826.64,1232.68 1852.06,1207.27 U9.13@1948.94,1207.27
U9-14: U9.14
U9-15: U9.15
U9-16: C50.2 Q3.3 U9.16 | length 311.6
  TopLayer w16.87: Q3.3@1786.02,1474.14 1786.02,1462.47 1891.85,1356.64 1987.27,1356.64 C50.2@2026.02,1395.39
UnNamedNet1: R11.1 U10.4 | length 208
  TopLayer w9.87: R11.1@5362.48,985.81 5376.44,971.85 5523.73,971.85 5549.77,997.89 U10.4@5549.77,1002.06
V10-1: U10.1
Y2-1: R50.2 U9.8 Y2.1 | length 160.9
  TopLayer w16.87: Y2.1@1647.06,984.14 1673.52,984.14 1697.27,1007.89 1729.77,1007.89 1729.77,942.47 R50.2@1727.69,940.39
Y2-3: R50.1 U9.7 Y2.3 | length 258.3
  TopLayer w16.87: Y2.3@1644.35,1078.93 1675.39,1078.93 1697.06,1057.27 1768.1,1057.27 1789.98,1035.39 1789.98,942.47 R50.1@1791.23,941.22

## Polygon pours and split planes (outlines as drawn)
D3-2 on TopLayer "TopLayer-D3-2" (hatched 90Degree grid 5.91 track 5.91, remove dead copper, pour order 0): 1583.1,1149.56 1583.1,667.47 608.52,667.06 608.52,2258.72 6247.69,2258.72 6247.69,622.06 1676.85,622.06 1676.85,885.81 1839.35,885.81 1839.35,1174.97 1581.85,1174.97
P1-1 on TopLayer "TopLayer-P1-1" (hatched 90Degree grid 7.87 track 7.87, remove dead copper, pour order 2): 1234.77,1806.22 1420.19,1806.22 1428.52,1797.89 1428.52,1259.56 951.85,1259.56 951.85,1325.81 952.27,1326.22 1158.1,1326.22 1231.44,1399.56 1231.44,1799.97
D3-2 on BottomLayer "BottomLayer-D3-2" (hatched 90Degree grid 5.91 track 5.91, remove dead copper, pour order 4): 890,2269.17 6183.33,2268.33 6290,2161.67 6290,766.67 6140,616.67 1661.67,616.67 1661.67,887.5 2000,887.5 2000,1346.67 1750,1346.67 1750,1063.33 1582.5,1063.33 1582.5,611.67 576.67,611.67 576.67,2285 855,2285
R2-1 on BottomLayer "BottomLayer-R2-1" (hatched 90Degree grid 7.87 track 7.87, remove dead copper, pour order 6): 1233.75,1109.17 2759.17,1109.17 2838.75,1029.58 2838.75,972.08 2838.75,908.33 2790.42,908.33 2790.42,990.42 2779.17,1001.67 1490,1001.67 1460.83,972.5 1232.92,972.5 1232.92,1109.58

## Keep-outs
KeepOutLayer:
  circle w3.94: c5392.16,782.06 r61.59
  circle w3.94: c5704.25,1843.72 r168.82
  circle w3.94: c5392.16,1842.27 r60.85
  circle w3.94: c4870.71,2188.93 r34.26
  circle w3.94: c4970.29,2188.52 r34.26
  circle w3.94: c5070.08,2188.31 r34.26
  circle w3.94: c4770.5,2188.31 r34.26
  circle w3.94: c1580.5,780.39 r60.13
  circle w3.94: c1578.42,1845.6 r61.88
  circle w3.94: c988.42,1846.22 r172.05
  lines w3.94: 593,760.39 593,663.72 6012.58,663.72 ccw(c6012.58,871.22) 6220.08,871.22 6220.08,2027.89 ; 888,663.41 887.89,663.31 593,663.31 593,2037.89 cw(c797.58,2037.89) 797.58,2242.47 6005.5,2242.47 ; 6005.91,2242.89 cw(c6005.91,2027.89) 6220.91,2027.89 ; 715.39,1383.72 715.39,1468.52 800.81,1468.52 800.81,1383.72 715.39,1383.72

## Other copper
TopLayer:
  rectangle net D3-2: 4360.19,1101.64 4397.27,1133.72
  rectangle net D3-2: 1910.39,1277.89 2000.19,1283.1
  rectangle net D3-2: 1911.44,1227.27 2004.98,1233.1
  rectangle net D3-2: 1908.52,1177.89 1996.02,1183.93
  rectangle net D3-2: 1909.14,1128.52 2003.31,1133.31
  rectangle net D3-2: 1904.14,1077.68 1998.94,1083.52
  rectangle net D3-2: 1899.56,1028.1 2005.19,1033.72
  rectangle net D3-2: 5760.6,2038.72 5793.52,2094.97
  rectangle net D3-2: 5327.06,1062.89 5383.1,1086.64
  rectangle net D3-2: 5334.56,1069.97 5382.48,1109.77
  rectangle net D3-2: 5377.48,1062.68 5400.19,1126.85
  rectangle net D3-2: 5327.06,1069.35 5342.9,1125.39
  rectangle net D3-2: 5326.44,1214.56 5332.27,1298.31
  rectangle net D3-2: 5342.48,1398.31 5381.65,1411.85
  rectangle net D3-2: 5382.27,1456.64 5391.44,1525.81
  rectangle net D3-2: 5374.77,1421.64 5383.94,1569.14
  rectangle net D3-2: 5327.69,1408.72 5345.6,1606.22
  rectangle net D3-2: 2085.19,1673.72 2510.19,2117.06
BottomLayer:
  rectangle net D3-2: 2067.5,1640.83 2529.17,2140.83

## Silkscreen, mask and mechanical layers (free items; w line width, h text height)
TopOverlay:
  lines w7.94: 2657.58,1437.89 2657.58,1792.06 4106.33,1792.06 4106.33,1437.89 2657.58,1437.89
  lines w8.94: 6181.85,1786.43 6205.19,1786.43 6205.19,1837.89
  lines w9.94: 6201.33,1502.06 6027.58,1502.06 6027.58,1345.81 6203,1345.81
  lines w10.94: 6204.25,1768.72 5860.08,1768.72 5860.08,1080.39 6212.58,1080.39
  text "Y2" at 3806.75,2083.72 h27
  text "Y1" at 3221.75,2080.39 h27
  text "12V" at 769.25,2076.22 h26
  text "X" at 2665.92,2070.39 h27
  text "VCC" at 4648.41,2062.89 h31
  text "VCC" at 5038.41,2062.89 h31
  text "5V" at 767.58,2001.22 h26
  text "RX" at 4665.08,1962.06 h32
  text "SCL" at 5045.91,1961.22 h33
  text "RUN" at 767.58,1932.06 h26
  text "+LR-" at 5896.75,1887.06 h27 r90
  text "TX" at 4664.25,1863.72 h32
  text "SDA" at 5050.91,1862.06 h33
  text "GND" at 5046.75,1758.72 h33
  text "GND" at 4652.58,1757.06 h33
  text "Y1-AXIS" at 3597.58,1003.72 h28
  text "GND" at 4977.58,1002.89 h26
  text "Y2-AXIS" at 4102.58,1002.06 h28
  text "GND" at 4562.58,1002.06 h28
  text "X-Limt" at 4675.91,1002.06 h28
  text "5V" at 4891.75,1002.06 h25
  text "5V" at 4480.08,1001.22 h28
  text "Y-Limt" at 5085.91,1001.22 h27
  text "X-AXIS" at 3098.42,999.56 h27
  text "PWM" at 2575.08,998.72 h24
  text "GND" at 2685.92,997.89 h25
  text "12V" at 2795.92,996.22 h25
  text "RST" at 5887.58,954.56 h27 r90
  text "GND" at 5887.58,843.72 h27 r90
  text "3V3" at 5745.91,795.39 h26
  text "DIO" at 5531.75,792.89 h28
  text "GND" at 5855.91,792.06 h28
  text "CLK" at 5637.58,791.22 h28
  text "LY-2Axis-4.5-V3" at 1775.08,719.56 h38
  text "20240228T5" at 1778.42,677.06 h23
  text "T=1.6MM" at 968.33,421.67 h84
BottomSolder:
  rectangle: 1869.56,1659.14 2539.98,2100.39
  rectangle: 2742.06,1537.89 2864.56,1675.39
  rectangle: 3320.81,1555.39 3443.73,1678.72
  rectangle: 3898.31,1557.06 4019.56,1679.97
  lines w28.94: 855.81,1527.47 4025.39,1532.47 ; 1089.56,1474.97 2588.31,1474.97 ; 1092.48,1582.89 2584.56,1582.89
  lines w35.94: 1892.89,2170.39 4403.31,2170.39
  lines w37.94: 1771.23,758.31 5200.81,758.31
  lines w39.94: 1774.14,700.81 5200.4,700.81